# Altium PCB BB.PcbDoc
Units mm, origin at the board's own origin, x right, y up, seen from the top; angles counter-clockwise.
Board outline 152.4 x 101.6 mm, 2 copper layers (Top Layer, Bottom Layer); 23 components, 21 nets, 88 pads, 0 vias.
Unrouted connection lines stored in the file: 52.
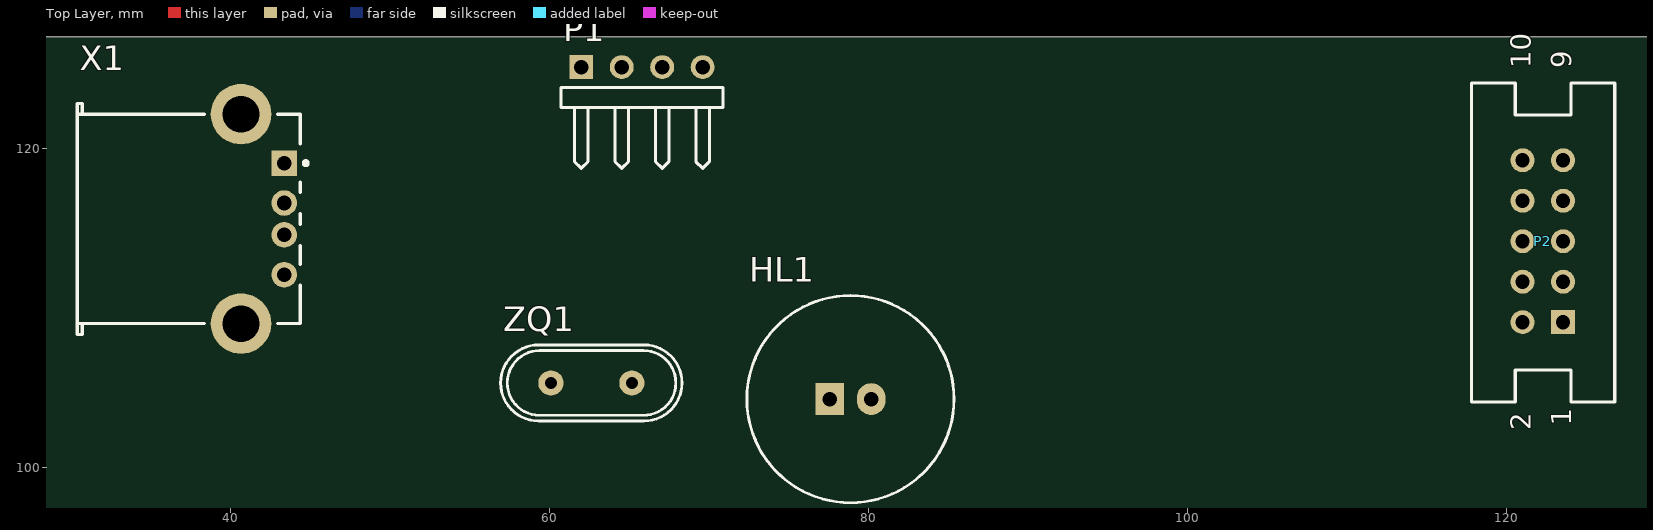
[diagram p0: Top Layer view]
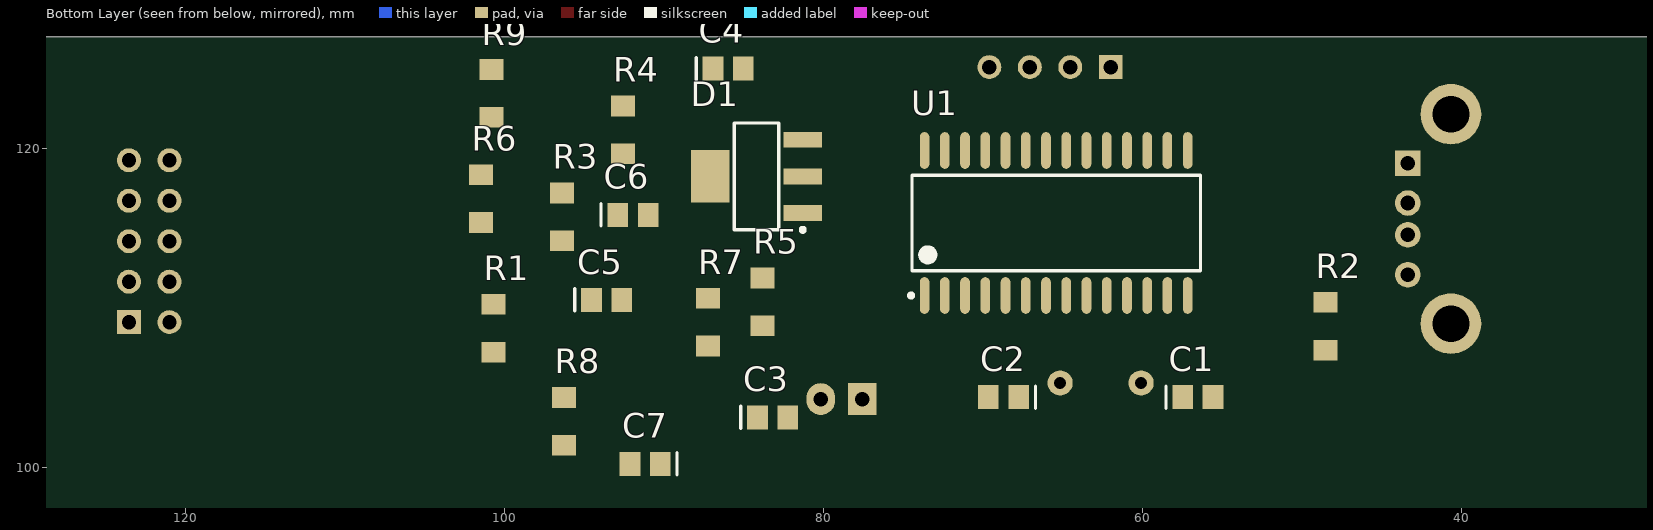
[diagram p1: Bottom Layer view, seen from below]

## Layer stack, top to bottom
Top Layer: signal copper 0.0356
Dielectric: dielectric 0.32, FR-4, Dk 4.8
Bottom Layer: signal copper 0.0356

## Board outline
25.4,25.4 177.8,25.4 177.8,127 25.4,127

## Design rules (kind name [scope] priority, off if disabled: settings)
Clearance [All] p1: gap=0.254
PolygonConnect [All] p1: connectstyle=Relief reliefconductorwidth=0.254 reliefentries=4 polygonreliefangle="90 Angle" airgapwidth=0.254
RoutingVias [All] p1: holewidth=0.711 width=1.27 viastyle="Through Hole" minholewidth=0.711 minwidth=1.27 maxholewidth=0.711 maxwidth=1.27
SolderMaskExpansion [All] p1: expansion=0.102
Width [All] p1: maxlimit=0.254 minlimit=0.254 preferedwidth=0.254
28 further rules are at their usual default settings.

## Components (designator, comment, footprint, x,y, rotation, side; value= is the part's Value field where it differs from the comment)
C1 "Cap Semi_2" C0805 56.515,104.394 r180 bottom
C2 "Cap Semi_2" C0805 68.707,104.394 r0 bottom
C3 "Cap Semi_2" C0805 83.185,103.124 r180 bottom
C4 "Cap Semi_2" C0805 85.986,125.005 r180 bottom
C5 "Cap Semi_2" C0805 93.599,110.49 r180 bottom
C6 "Cap Semi_2" C0805 91.948,115.824 r180 bottom
C7 "Cap Semi_2" C0805 91.186,100.203 r0 bottom
D1 "LD 1117-33" SOT230P700X180-4N 84.201,118.237 r0 bottom
HL1 "10AW4XC" "Led_Rus D=10 d=0.9 w=2.54" 78.867,104.267 r0 top
P1 "Header 4H" HDR1X4H 61.976,125.095 r0 top
P2 "BH-10" "BH-10 HDR2X5" 123.571,109.093 r90 top
R1 "Resistor 0805" "2012[0805] - wa" 100.711,108.712 r270 bottom
R2 "Resistor 0805" "2012[0805] - wa" 48.514,108.839 r90 bottom
R3 "Resistor 0805" "2012[0805] - wa" 96.393,115.697 r270 bottom
R4 "Resistor 0805" "2012[0805] - wa" 92.583,121.158 r270 bottom
R5 "Resistor 0805" "2012[0805] - wa" 83.82,110.363 r270 bottom
R6 "Resistor 0805" "2012[0805] - wa" 101.473,116.84 r270 bottom
R7 "Resistor 0805" "2012[0805] - wa" 87.249,109.093 r270 bottom
R8 "Resistor 0805" "2012[0805] - wa" 96.266,102.87 r270 bottom
R9 "Resistor 0805" "2012[0805] - wa" 100.838,123.444 r270 bottom
U1 "PIC18F25J50-I/SO" SOIC-SO28_N 65.405,115.316 r90 bottom
X1 "USBA-1J" USB2.5-2H4C 30.353,115.57 r180 top
ZQ1 "20 MHz" HC49S 62.611,105.283 r0 top

## Footprints (in the part's own frame and the unit in brackets; to place one, negate y for a bottom-side part, rotate by r counter-clockwise, add the part's x,y. Pads: shape width x height; smd on the part's side, far side on the other; paste and mask are expansions set on the pad)
"2012[0805] - wa" [mm] "Chip Resistor; Body 2.0 x 1.3 mm (LxW typ)"
  rect 1.3x1.5 smd: 1(-1.5,0) 2(1.5,0)
"BH-10 HDR2X5" [mm] "Connector; Header; 5x2 Position"
  rect 1.5x1.5 hole 0.9: 1(0,0)
  round 1.5 hole 0.9: 2(0,2.54) 3(2.54,0) 4(2.54,2.54) 5(5.08,0) 6(5.08,2.54) 7(7.62,0) 8(7.62,2.54) 9(10.16,0) 10(10.16,2.54)
  silkscreen extent -5,-3.25 15,5.75
C0805 [mm] "Chip Capacitor; Body 2.0 x 1.2 mm (LxW typ)"
  rect 1.3x1.5 smd: 1(-0.95,0) 2(0.95,0)
  silkscreen extent -2,-0.7 -2,0.7
HC49S [mil]
  round 62 hole 30: 1(-100,0) 2(100,0)
  silkscreen extent -224,-94 224,94
HDR1X4H [mm] "Connector; Header; 4 Position; Right Angle"
  rect 1.5x1.5 hole 0.9: 1(0,0)
  round 1.5 hole 0.9: 2(2.54,0) 3(5.08,0) 4(7.62,0)
  silkscreen extent -1.27,-6.35 8.89,-1.27
"Led_Rus D=10 d=0.9 w=2.54" [mm] "Светодиод D=10 d=0.6 V=2.5V Rn=~300-270R"
  rect 1.8x2 hole 0.9: 1(-1.3,0)
  oval 1.8x2 hole 0.9: 2(1.3,0)
  silkscreen extent -6.5,-6.5 6.5,6.5
SOIC-SO28_N [mm] "SOIC, 28-Leads, Body 17.9x7.5mm, Pitch 1.27mm, IPC Medium Density"
  oval 2.3x0.6 smd: 1(-4.55,8.255) 2(-4.55,6.985) 3(-4.55,5.715) 4(-4.55,4.445) 5(-4.55,3.175) 6(-4.55,1.905) 7(-4.55,0.635) 8(-4.55,-0.635) 9(-4.55,-1.905) 10(-4.55,-3.175) 11(-4.55,-4.445) 12(-4.55,-5.715) 13(-4.55,-6.985) 14(-4.55,-8.255) 15(4.55,-8.255) 16(4.55,-6.985) 17(4.55,-5.715) 18(4.55,-4.445) 19(4.55,-3.175) 20(4.55,-1.905) 21(4.55,-0.635) 22(4.55,0.635) 23(4.55,1.905) 24(4.55,3.175) 25(4.55,4.445) 26(4.55,5.715) 27(4.55,6.985) 28(4.55,8.255)
  silkscreen extent -4.67,-9.05 3,9.23, body extent -3.8,-9.06 3.8,9.06, height 2.65
SOT230P700X180-4N [mm] "SOT223, 4-Leads, Body 6,50x7,00mm (avg), Pitch 2,30mm, IPC Medium Density"
  rect 2.4x1 smd: GND(-2.9,2.3) IN(-2.9,-2.3) OUT(-2.9,0)
  rect 2.4x3.3 smd: OUT(2.9,0)
  silkscreen extent -3.02,-3.35 1.4,3.47, body extent -1.85,-3.35 1.85,3.35, height 1.8
USB2.5-2H4C [mm] "Connector; USB1.1, Type A, Thru-Hole; 4 Position; Right Angle"
  rect 1.6x1.6 hole 0.92: 1(-12.99,-3.5)
  round 1.6 hole 0.92: 2(-12.99,-1) 3(-12.99,1) 4(-12.99,3.5)
  round 3.8 hole 2.3: 5(-10.28,6.57) 6(-10.28,-6.57)
  silkscreen extent -14.47,-7.25 0,7.25, body extent -14,-7.25 0,7.25, height 7.01

## Part data
C1 C2 C3 C4 C5 C6 C7: "Capacitor (Semiconductor SIM Model)"
HL1: library part "LED D=10", "Typical INFRARED GaAs LED"
P1: "Header, 4-Pin, Right Angle"
P2: "Header, 5-Pin, Dual row 2.54"
U1: "Low Power, High Performance USB Microcontroller with nanoWatt XLP Technology, 28-pin SOIC, Industrial Temperature"
X1: "Разъем USBA на плату"
ZQ1: library part XTAL, "Crystal Oscillator"

## Nets (pads, with @x,y where several pads share a name; then routed paths per layer and width w, separated by ;. In a path a pad name is that pad's centre, name@x,y a point inside that pad or via, vN(x,y) a via of type N, cw(c..) or ccw(c..) an arc to the next point about the centre after c; other vN are vias at no path point)
DM: U1.15 X1.2
DP: U1.16 X1.3
GND: C1.2 C2.2 C3.1 C4.1 C5.1 C6.1 C7.1 D1.GND HL1.2 P1.4 P2.2 P2.10 R7.1 R8.1 R9.2 U1.8 U1.19 X1.4 X1.5 X1.6
NetC1_1: C1.1 U1.10 ZQ1.1
NetC2_1: C2.1 U1.9 ZQ1.2
NetC3_2: C3.2 U1.14
NetC4_2: C4.2 C5.2 D1.OUT P2.4
NetHL1_1: HL1.1 R2.1
NetP1_1: P1.1 R1.2 U1.1
NetP2_1: P2.1 R6.2 R9.1
NetP2_3: P2.3 R4.2
NetP2_5: P2.5 R3.2 R8.2
NetP2_9: P2.9 R5.2 R7.2
NetR2_2: R2.2 U1.13
NetR3_1: R3.1 U1.24
NetR4_1: R4.1 U1.21
NetR5_1: R5.1 U1.18
NetR6_1: R6.1 U1.22
PGC: P1.2 U1.27
PGD: P1.3 U1.28
VCC: C6.2 C7.2 D1.IN R1.1 U1.20 X1.1
pads on no net: P2.6 P2.7 P2.8 U1.2 U1.3 U1.4 U1.5 U1.6 U1.7 U1.11 U1.12 U1.17 U1.23 U1.25 U1.26

## Text inside footprints (layer, text, board x,y; h text height)
P2: Top Overlay "2" at 121.539,102.303 h1.27 r90; Top Overlay "1" at 124.071,102.593 h1.27 r90; Top Overlay "9" at 124.079,125.027 h1.27 r90; Top Overlay "10" at 121.539,125.027 h1.27 r90